# Altium PCB final_sensor_pcb_v3.PcbDoc (part 1 of 3)
Units mm, origin at the board's own origin, x right, y up, seen from the top; angles counter-clockwise.
Board outline 108.2 x 22.22 mm, 2 copper layers (Top Layer, Bottom Layer); 94 components, 57 nets, 253 pads, 98 vias.
Unrouted connection lines stored in the file: 1.
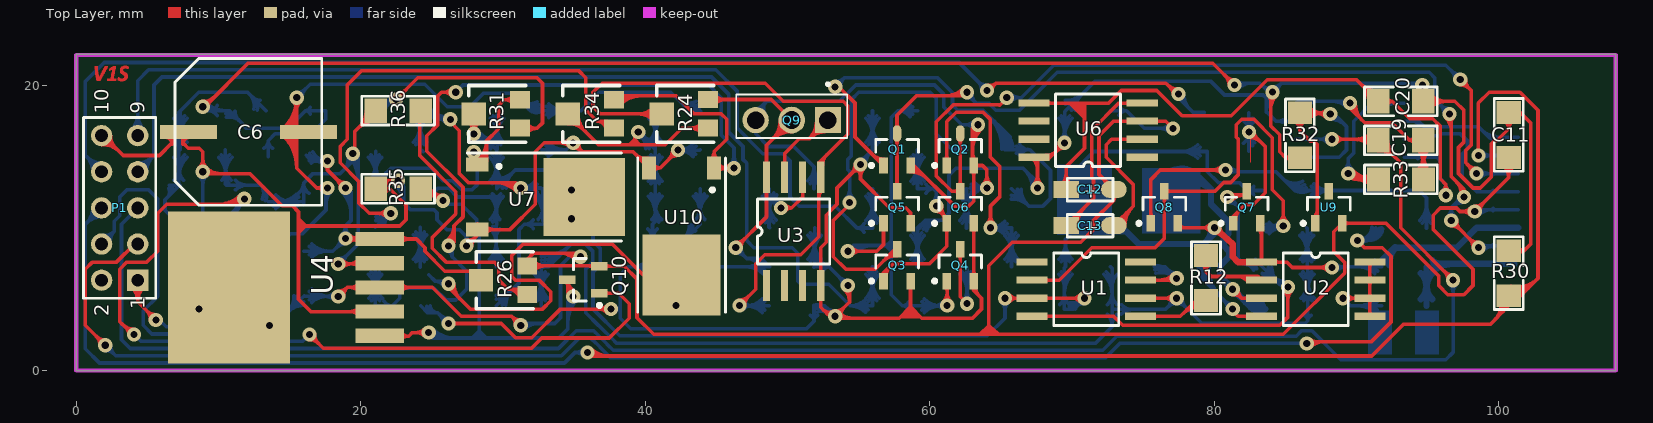
[diagram p0: Top Layer view]
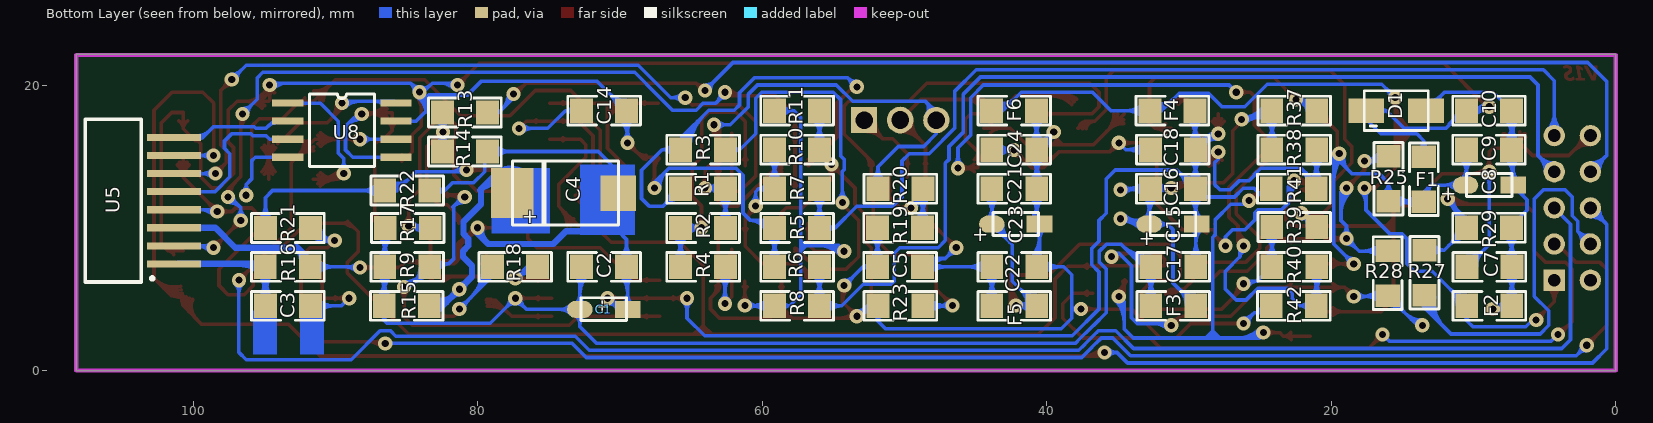
[diagram p1: Bottom Layer view, seen from below]

## Layer stack, top to bottom
Top Layer: signal copper 0.0356
Dielectric: dielectric 0.32, FR-4, Dk 4.8
Bottom Layer: signal copper 0.0356

## Board outline
0,22.225 108.204,22.225 108.204,0 0,0

## Design rules (kind name [scope] priority, off if disabled: settings)
Clearance [All] p1: gap=0.254
DiffPairsRouting [All] p1: maxlimit=0.254 minlimit=0.254 mostfreqgap=0.254 maxuncoupledlength=12.7
PolygonConnect [All] p1: connectstyle=Relief reliefconductorwidth=0.254 reliefentries=4 polygonreliefangle="90 Angle"
RoutingVias [All] p1: holewidth=0.5 width=1 viastyle="Through Hole" minholewidth=0.5 minwidth=1 maxholewidth=0.5 maxwidth=1
SilkscreenOverComponentPads [All] p1: minsilkscreentomaskgap=0.254
SolderMaskExpansion [All] p1: expansion=0.102
Width [All] p1: maxlimit=0.5 minlimit=0.15 preferedwidth=0.15
26 further rules are at their usual default settings.

## Classes and differential pairs
differential pair OUT: +OUT_P -OUT_N

## Components (designator, comment, footprint, x,y, rotation, side; value= is the part's Value field where it differs from the comment)
C1 "4.7uf" cap_smd_a 71.133,4.322 r180 bottom
C2 "100nF" 1206 71.095,7.264 r270 bottom
C3 "0.22UF" 1206 93.345,4.572 r90 bottom
C4 "470uf" cap_smd_d 73.787,12.446 r0 bottom
C5 "100nf" 1206 50.292,7.264 r270 bottom
C6 "1000uf" c_cyl_smd 12.065,16.637 r180 top
C7 "100nf" 1206 8.89,7.315 r90 bottom
C8 "4.7uf" cap_smd_a 8.88,13.052 r180 bottom
C9 "100nf" 1206 8.918,15.545 r90 bottom
C10 "100nf" 1206 8.918,18.288 r90 bottom
C11 "100nf" 1206 100.711,16.574 r0 top
C12 "10uf" cap_smd_a 71.258,12.7 r180 top
C13 "10uf" cap_smd_a 71.258,10.16 r180 top
C14 "100nf" 1206 71.095,18.237 r270 bottom
C15 "4.7uf" cap_smd_a 31.115,10.308 r180 bottom
C16 "100nf" 1206 31.142,12.802 r90 bottom
C17 "100nf" 1206 31.115,7.315 r90 bottom
C18 "100nf" 1206 31.142,15.545 r90 bottom
C19 "Ceramic 330n" 1206 93.116,16.154 r270 top
C20 "100nf" 1206 93.116,18.898 r270 top
C21 "100nf" 1206 42.291,12.802 r90 bottom
C22 "100nf" 1206 42.291,7.315 r90 bottom
C23 "4.7uf" cap_smd_a 42.175,10.308 r180 bottom
C24 "100nf" 1206 42.291,15.545 r90 bottom
D1 "SMBJ5" tvs 15.494,18.288 r90 bottom
F1 "Ferrite bead" 1206 13.462,13.462 r180 bottom
F2 "Ferrite bead" 1206 8.865,4.521 r270 bottom
F3 "Ferrite bead" 1206 31.115,4.572 r90 bottom
F4 "Ferrite bead" 1206 31.142,18.237 r270 bottom
F5 "Ferrite bead" 1206 42.291,4.572 r90 bottom
F6 "Ferrite bead" 1206 42.266,18.237 r270 bottom
P1 "Header 5X2" HDR2X5 4.318,6.35 r90 top
Q1 "bc807" sot-23#1 57.658,15.494 r0 top
Q2 "bc807" sot-23#1 62.103,15.494 r0 top
Q3 "bc817" sot-23#2 57.658,7.366 r0 top
Q4 "bc817" sot-23#2 62.103,7.366 r0 top
Q5 "bc817" sot-23#2 57.658,11.43 r0 top
Q6 "bc817" sot-23#2 62.103,11.43 r0 top
Q7 "bc817" sot-23#3 82.233,11.43 r0 top
Q8 "bc817" sot-23#2 76.454,11.43 r0 top
Q9 "BD135" sot-32 50.292,17.907 r180 top
Q10 "bc817" sot-23#2 35.687,6.35 r90 top
R1 "10k" 1206 64.135,12.751 r270 bottom
R2 "10k" 1206 64.135,9.991 r270 bottom
R3 "1k" 1206 64.135,15.494 r270 bottom
R4 "1k" 1206 64.135,7.264 r270 bottom
R5 "0" 1206 57.531,9.991 r270 bottom
R6 "0" 1206 57.531,7.264 r270 bottom
R7 "470" 1206 57.531,12.751 r270 bottom
R8 "470" 1206 57.531,4.521 r270 bottom
R9 "18K" 1206 84.962,7.315 r90 bottom
R10 "10k" 1206 57.531,15.494 r270 bottom
R11 "10k" 1206 57.531,18.237 r270 bottom
R12 "100" 1206 79.375,6.489 r180 top
R13 "1K" 1206 80.898,18.161 r90 bottom
R14 "10K" 1206 80.898,15.418 r90 bottom
R15 "22" 1206 84.963,4.521 r270 bottom
R16 "1.5" 1206 93.32,7.264 r270 bottom
R17 "18K" 1206 84.924,10.042 r90 bottom
R18 "100" 1206 77.343,7.264 r270 bottom
R19 "10k" 1206 50.292,10.008 r270 bottom
R20 "10k" 1206 50.292,12.802 r90 bottom
R21 "1K" 1206 93.345,10.042 r90 bottom
R22 "10K" 1206 84.962,12.674 r90 bottom
R23 "10k" 1206 50.292,4.572 r90 bottom
R24 "RPot" "pot smd" 42.799,18.034 r90 top
R25 "Resistor" 1206 16.002,13.462 r0 bottom
R26 "RPot" "pot smd" 30.099,6.35 r90 top
R27 "1K" 1206 13.462,6.858 r0 bottom
R28 "Resistor" 1206 16.002,6.858 r180 bottom
R29 "1K" 1206 8.918,10.058 r90 bottom
R30 "Resistor" 1206 100.711,6.858 r0 top
R31 "RPot" "pot smd" 29.591,18.034 r90 top
R32 "Resistor" 1206 85.979,16.51 r180 top
R33 "Res 3K2" 1206 93.091,13.462 r90 top
R34 "RPot" "pot smd" 36.195,18.034 r90 top
R35 "1K" 1206 22.606,12.802 r90 top
R36 "Resistor" 1206 22.606,18.288 r90 top
R37 "Resistor" 1206 22.606,18.288 r90 bottom
R38 "Resistor" 1206 22.606,15.545 r90 bottom
R39 "Resistor" 1206 22.606,10.105 r90 bottom
R40 "Resistor" 1206 22.606,7.315 r90 bottom
R41 "Resistor" 1206 22.606,12.751 r270 bottom
R42 "Resistor" 1206 22.606,4.521 r270 bottom
U1 "TC4428" sop8 70.993,5.842 r0 top
U2 "IRF7105" sop8 87.122,5.842 r0 top
U3 "LM358N" sop8 50.292,9.779 r90 top
U4 "TL1963AKTTR" tl1963 21.336,5.842 r90 top
U5 "HMC1001" HMC1001 103.251,11.938 r90 bottom
U6 "LMC7660IM" sop8 71.12,16.764 r180 top
U7 "LM1117T-ADJ" dpak 31.496,11.938 r0 top
U8 "AMP04" sop8 89.535,17.018 r180 bottom
U9 "LM4040" sot-23#2 88.011,11.43 r0 top
U10 "LM1117T-ADJ" dpak 42.291,10.922 r270 top

## Footprints (in the part's own frame and the unit in brackets; to place one, negate y for a bottom-side part, rotate by r counter-clockwise, add the part's x,y. Pads: shape width x height; smd on the part's side, far side on the other; paste and mask are expansions set on the pad)
1206 [mm]
  rect 1.7x1.6 smd: 1(-0.025,-1.6) 2(-0.025,1.563)
  silkscreen extent -1.04,-2.57 0.99,2.54, body extent -0.81,-1.68 0.79,1.68, height 1.1
c_cyl_smd [mm]
  rect 4x1 smd: 1(4.191,-0.127) 2(-4.267,-0.127)
  silkscreen extent -5.18,-5.28 5.12,5.02, body extent -5.18,-5.28 5.12,5.02, height 10
cap_smd_a [mm]
  oval 1.8x1.2 smd: 1(-1.676,-0.025)
  rect 1.8x1.2 smd: 2(1.676,-0.025)
  silkscreen extent -1.6,-0.81 1.6,0.79
cap_smd_d [mm]
  rect 3x3.5 smd: 1(3.767,-0.025)
  rect 2.5x2.5 smd: 2(-3.683,-0.025)
  silkscreen extent -3.68,-2.29 3.77,2.21
dpak [mm]
  rect 1.6x1 smd: 1(-3.319,2.539) 3(-3.319,-2.031)
  rect 5.7x5.5 smd: 2(4.208,0.254)
  silkscreen extent -4.02,-2.83 6.83,3.34
HDR2X5 [mm] "Connector; Header; 5x2 Position"
  rect 1.5x1.5 hole 0.9: 1(0,0)
  round 1.5 hole 0.9: 2(0,2.54) 3(2.54,0) 4(2.54,2.54) 5(5.08,0) 6(5.08,2.54) 7(7.62,0) 8(7.62,2.54) 9(10.16,0) 10(10.16,2.54)
  silkscreen extent -1.27,-1.27 11.43,3.81
HMC1001 [mm]
  rect 0.5x3.81 smd: 1(-4.445,-1.905) 2(-3.175,-1.905) 3(-1.905,-1.905) 4(-0.635,-1.905) 5(0.635,-1.905) 6(1.905,-1.905) 7(3.175,-1.905) 8(4.445,-1.905)
  silkscreen extent -5.71,-0.48 5.71,4.32
"pot smd" [mm]
  rect 1.2x1.4 smd: 1(-1,-1.6) 3(1,-1.6)
  rect 1.6x1.7 smd: 2(0,1.65)
  silkscreen extent -2,-2 2,2
sop8 [mm]
  rect 2.2x0.5 smd: 1(-3.81,1.778) 2(-3.81,0.508) 3(-3.81,-0.762) 4(-3.81,-2.032) 5(3.806,-2.032) 6(3.806,-0.762) 7(3.806,0.508) 8(3.806,1.778)
  silkscreen extent -2.29,-2.67 2.29,2.41
sot-23#1 [mm]
  rect 0.6x1.15 smd: 1(-0.919,-1.081) 2(0.981,-1.081)
  oval 0.6x1.15 smd: 3(0.031,1.169)
  silkscreen extent -1.89,-1.21 1.53,0.74, body extent -1.42,-1.18 1.48,1.12, height 1
sot-23#2 [mm]
  rect 0.6x1.15 smd: 1(-0.919,-1.081) 2(0.981,-1.081) 3(0.031,1.169)
  silkscreen extent -1.89,-1.21 1.53,0.74, body extent -1.42,-1.18 1.48,1.12, height 1
sot-23#3 [mm]
  rect 0.6x1 smd: 1(-0.919,-1.081)
  rect 0.6x1.15 smd: 2(0.981,-1.081) 3(0.031,1.169)
  silkscreen extent -1.89,-1.21 1.53,0.74, body extent -1.42,-1.18 1.48,1.12, height 1
sot-32 [mm]
  rect 1.85x1.85 hole 1.23: 1(-2.54,0.305)
  round 1.88 hole 1.25: 2(0,0.305)
  round 1.85 hole 1.23: 3(2.54,0.305)
  silkscreen extent -3.9,-2.32 3.9,1.56
tl1963 [mm]
  rect 1x3.4 smd: 1(-3.4,0) 2(-1.7,0) 3(0,0) 4(1.7,0) 5(3.4,0)
  rect 10.7x8.6 smd: 3(0,10.6)
tvs [mm]
  rect 1.7x2.5 smd: 1(-0.025,-2.159) 2(-0.025,2.032)
  silkscreen extent -1.42,-2.32 1.38,2.18, body extent -1.5,-2.76 1.42,2.74, height 2.23

## Part data
C1 C4 C8 C12 C13 C15 C23: library part "Cap Pol1", "Polarized Capacitor (Radial)"
C2 C3 C5 C7 C9 C10 C11 C14 C16 C17 C18 C19 C20 C21 C22 C24: library part Cap, "Capacitor"
C6: library part "Cap Pol1", "electrolytic smd cap"
D1: library part "Diode 10TQ040", "tvs"
F1 F2 F3 F4 F5 F6: library part Inductor, "Ferrite bead, 1206"
P1: "Header, 5-Pin, Dual row"
Q1 Q2: library part 2N3906, "PNP General Purpose Amplifier"
Q3 Q4 Q5 Q6 Q7 Q8 Q9 Q10: library part 2N3904, "NPN General Purpose Amplifier"
R1 R2 R3 R4 R5 R6 R7 R8 R9 R10 R11 R12 R13 R14 R15 R16 R17 R18 R19 R20 R21 R22 R23 R27 R29 R35: library part Res1, "Resistor"
R24 R26 R31 R34: "Potentiometer"
R25 R28 R30 R32 R36 R37 R38 R39 R40 R41 R42: "Resistor, 1/4W"
R33: library part Resistor, "General Resistor"
U2: library part IRF7106
U3: "Dual Low-Power Operational Amplifier"
U4: library part TL1963
U6: "Switched Capacitor Voltage Converter"
U7 U10: "800mA Low-Dropout Linear Regulator"
U8: library part "Op Amp"
U9: "Precision Micropower Shunt Voltage Reference, 3-pin SOT-23"

## Via types
v1: diameter 1, hole 0.5, Top Layer to Bottom Layer, 98 vias

## Nets (pads, with @x,y where several pads share a name; then routed paths per layer and width w, separated by ;. In a path a pad name is that pad's centre, name@x,y a point inside that pad or via, vN(x,y) a via of type N, cw(c..) or ccw(c..) an arc to the next point about the centre after c; other vN are vias at no path point)
5V0: C10.2 C11.2 C14.2 C20.2 D1.2 F1.2 R5.1 R6.1 R30.2 R32.2 U6.8 U8.7 | length 245.3
  Top Layer w0.254: v1@8.89,18.661 ccw(c8.89,19.255) 9.31,18.835 ; v1@8.89,18.915 ccw(c8.89,20.122) 9.744,19.269 ; v1@9.144,18.669 12.065,21.59 79.883,21.59 v1(81.407,20.066) ; v1@9.263,18.542 cw(c9.857,18.542) 9.437,18.962 ; U6.8@67.227,14.899 cw(c66.414,14.086) 67.564,14.086 ; v1@67.3,13.091 ccw(c66.664,13.727) 67.564,13.727 ccw(c68.464,13.727) v1@67.828,13.091 ; U6.8@67.407,15.079 cw(c67.027,14.699) 67.564,14.699 ; v1(67.564,12.827) 67.564,14.736 U6.8@67.314,14.986 68.453,14.986 ; U6.8@68.164,14.855 ccw(c68.164,15.236) 68.434,14.967 ; U6.8@68.164,15.109 ccw(c68.164,16.104) 68.867,15.4 ; U6.8@68.253,14.901 cw(c68.453,14.708) 68.453,14.986 ; U6.8@68.253,15.071 ccw(c68.453,15.264) 68.453,14.986 ; v1@69.096,16.002 cw(c68.196,16.002) 68.832,15.365 cw(c69.469,14.729) v1@69.469,15.629 ; v1(69.469,16.002) 68.453,14.986 ; v1@81.034,20.066 ccw(c80.134,20.066) 80.77,20.703 ccw(c81.407,21.339) v1@81.407,20.439 ; v1@83.819,19.302 cw(c83.51,18.993) 83.947,18.993 ; 83.947,18.338 cw(c85.311,18.338) v1@84.346,19.302 ; 83.947,18.951 cw(c84.698,18.951) v1@84.167,19.482 ; v1@83.947,19.431 83.947,17.204 84.582,16.569 84.582,15.367 85.002,14.947 ; R32.2@85.32,14.722 ccw(c85.002,14.61) 85.002,14.947 ; R32.2@85.32,15.172 cw(c85.002,15.285) 85.002,14.947 ; R32.2@86.004,14.947 85.002,14.947 ; C20.2@94.275,19.511 ccw(c93.762,20.193) v1@94.615,20.193 ; v1@94.351,19.802 cw(c93.715,19.166) 94.615,19.166 cw(c95.515,19.166) v1@94.879,19.802 ; C20.2@94.615,18.987 v1@94.615,20.193 ; C20.2@94.615,19.773 ccw(c95.099,19.773) C20.2@94.874,19.344 ; C20.2@94.679,18.923 96.901,18.923 97.536,18.288 97.536,16.061 97.155,15.68 97.155,13.843 98.171,12.827 98.679,12.827 99.455,13.603 99.455,15.932 99.678,16.155 99.848,16.155 100.686,16.993 ; C20.2@94.975,18.627 cw(c95.691,17.912) 95.691,18.923 cw(c95.691,19.935) C20.2@94.975,19.219 ; C20.2@94.992,19.569 cw(c95.32,20.193) v1@94.615,20.193 ; C20.2@95.155,18.447 cw(c96.304,17.298) 96.304,18.923 cw(c96.304,20.548) C20.2@95.155,19.399 ; C11.2@100.358,17.549 cw(c100.049,16.993) 100.686,16.993 ; R30.2@100.686,8.421 101.766,8.421 ; C11.2@101.013,17.549 ccw(c101.322,16.993) 100.686,16.993 ; R30.2@101.352,8.15 cw(c101.766,7.969) 101.766,8.421 ; R30.2@101.352,8.691 ccw(c101.766,8.873) 101.766,8.421 ; 100.686,16.993 C11.2@100.686,18.137 101.497,18.137 102.235,17.399 102.235,8.89 101.766,8.421
  Bottom Layer w0.254: v1@8.89,18.415 v1(8.89,18.542) ; v1@8.974,18.626 ccw(c9.852,19.504) C10.2@9.852,18.263 ; v1@9.154,18.806 ccw(c10.465,20.117) C10.2@10.465,18.263 ; C10.2@9.915,17.898 ccw(c9.246,17.467) v1@9.246,18.263 ; C10.2@9.915,18.627 cw(c9.246,19.059) v1@9.246,18.263 ; C10.2@10.511,18.051 cw(c10.654,17.298) C10.2@11.196,17.839 ; C10.2@10.558,17.801 cw(c10.762,16.727) 11.535,17.5 ; C10.2@11.153,18.213 ccw(c11.952,18.213) 11.387,17.648 ; F1.2@13.167,15.617 ccw(c12.876,16.154) 13.487,16.154 ; F1.2@13.487,15.025 13.487,16.154 ; F1.2@13.808,15.617 cw(c14.099,16.154) 13.487,16.154 ; D1.2@16.444,18.022 ccw(c16.104,17.901) 16.104,18.263 ; D1.2@16.444,18.504 cw(c16.104,18.624) 16.104,18.263 ; R6.1@58.655,7.816 ccw(c57.506,8.965) 59.131,8.965 ccw(c60.756,8.965) R6.1@59.607,7.816 ; R5.1@58.655,9.491 cw(c57.506,8.342) 59.131,8.342 cw(c60.756,8.342) R5.1@59.607,9.491 ; R6.1@58.835,7.636 ccw(c58.12,8.351) 59.131,8.351 ccw(c60.143,8.351) R6.1@59.427,7.636 ; R5.1@58.835,9.67 cw(c58.12,8.955) 59.131,8.955 cw(c60.143,8.955) R5.1@59.427,9.67 ; R6.1@59.131,7.29 R5.1@59.131,10.017 59.664,10.549 60.817,10.549 ; R5.1@59.285,10.007 cw(c60.076,9.701) 60.076,10.549 ; R5.1@59.522,9.915 cw(c60.446,9.558) 60.446,10.549 ; R5.1@59.759,9.824 cw(c60.817,9.415) 60.817,10.549 ; 66.658,14.114 cw(c65.371,12.827) v1@67.191,12.827 ; 67.091,13.681 cw(c66.238,12.827) v1@67.445,12.827 ; v1(67.564,12.827) 67.564,13.208 66.548,14.224 61.831,14.224 61.341,13.734 61.341,11.073 60.817,10.549 ; C14.2@69.056,17.737 cw(c68.059,16.74) 69.469,16.74 ; v1@69.205,16.266 ccw(c68.569,16.902) 69.469,16.902 ccw(c70.369,16.902) v1@69.733,16.266 ; C14.2@69.236,17.916 cw(c68.672,17.353) 69.469,17.353 ; v1@69.469,16.436 cw(c71.308,16.436) C14.2@70.008,17.737 ; 69.469,17.049 cw(c70.695,17.049) C14.2@69.828,17.916 ; C14.2@69.532,18.732 ccw(c69.532,19.864) 70.332,19.063 ; C14.2@69.532,18.986 ccw(c69.532,20.731) 70.766,19.497 ; v1@69.596,16.002 v1(69.469,16.002) 69.469,18.2 C14.2@69.532,18.263 71.589,20.32 79.756,20.32 80.709,19.367 83.418,19.367 83.641,19.143 ; C14.2@69.951,18.313 cw(c70.842,18.313) C14.2@70.212,18.942 ; C14.2@70.205,18.313 cw(c71.709,18.313) 70.645,19.376 ; v1(81.407,20.066) 81.534,20.193 83.185,20.193 83.812,19.566 v1@84.064,19.566 ; v1@81.491,19.982 cw(c82.001,19.472) 82.001,20.193 cw(c82.001,20.66) v1@81.671,20.33 ; v1@81.671,19.802 cw(c82.614,18.859) 82.614,20.193 ; 83.32,20.058 ccw(c83.749,20.486) v1@83.955,19.917 ; 83.603,19.775 ccw(c83.899,20.072) v1@84.042,19.678 ; 83.641,18.143 cw(c84.92,18.143) v1@84.272,19.244 ; 83.641,18.587 cw(c84.659,18.587) v1@84.143,19.463 ; 83.641,19.031 cw(c84.398,19.031) v1@84.014,19.682 ; v1@84.087,19.939 ccw(c84.096,20.806) 84.71,20.193 ; v1@84.456,19.57 cw(c85.323,19.58) 84.71,20.193 ; U8.7@84.792,17.439 ccw(c84.582,17.229) 84.582,17.526 ccw(c84.582,17.823) U8.7@84.792,17.613 ; U8.7@85.729,17.526 84.328,17.526 83.641,18.213 83.641,19.143 ; 93.408,20.193 cw(c93.408,18.859) v1@94.351,19.802 ; v1@94.351,20.33 cw(c94.021,20.66) 94.021,20.193 cw(c94.021,19.472) v1@94.531,19.982 ; v1@94.615,20.193 84.71,20.193 ; v1@9.246,18.263 C10.2@10.48,18.263 10.773,18.263 11.704,17.331 11.704,17.255 11.927,17.032 14.873,17.032 16.104,18.263 ; 13.487,16.154 13.97,16.637 16.51,16.637 17.526,17.653 D1.2@17.526,18.263 16.104,18.263 ; 83.641,19.143 v1@84.064,19.566 ; v1@84.064,19.566 v1(84.083,19.566) 84.71,20.193
  other v1: 94.615,20.066
8V0: C1.1 C2.1 C17.2 F3.2 R9.2 R15.1 R17.2 U1.6 | length 124.4
  Top Layer w0.254: U1.6@74.799,5.08 v1(77.343,5.08) ; U1.6@75.736,4.993 cw(c75.946,4.783) 75.946,5.08 cw(c75.946,5.377) U1.6@75.736,5.167 ; v1@77.079,4.816 ccw(c76.442,4.179) 76.442,5.08 ccw(c76.443,5.98) v1@77.079,5.344
  Bottom Layer w0.254: F3.2@32.202,5.073 ccw(c31.053,6.221) 32.678,6.221 ccw(c34.303,6.221) F3.2@33.154,5.073 ; C17.2@32.202,6.764 cw(c31.053,5.615) 32.678,5.615 cw(c34.303,5.615) C17.2@33.154,6.764 ; F3.2@32.382,4.893 ccw(c31.666,5.608) 32.678,5.608 ccw(c33.689,5.608) F3.2@32.974,4.893 ; C17.2@32.382,6.944 cw(c31.666,6.228) 32.678,6.228 cw(c33.689,6.228) C17.2@32.974,6.944 ; C17.2@32.677,7.251 ccw(c32.682,8.402) 33.496,7.588 ; F3.2@32.678,4.547 C17.2@32.678,7.29 33.198,7.29 34.79,8.882 ; C17.2@32.678,7.505 ccw(c32.685,9.262) 33.927,8.019 ; C17.2@32.679,7.759 ccw(c32.688,10.121) 34.359,8.451 ; C17.2@32.68,8.013 ccw(c32.692,10.98) 34.79,8.882 ; C2.1@72.219,6.764 cw(c70.794,5.339) 72.809,5.339 ; C2.1@72.399,6.943 cw(c71.408,5.952) 72.809,5.952 ; C1.1@72.475,3.962 cw(c71.667,3.155) 72.809,3.155 cw(c73.951,3.155) C1.1@73.143,3.962 ; C1.1@72.475,4.631 ccw(c71.667,5.439) 72.809,5.439 ccw(c73.951,5.439) C1.1@73.143,4.631 ; C2.1@72.695,7.29 72.809,7.175 C1.1@72.809,4.297 ; 72.809,5.891 cw(c74.044,5.891) C2.1@73.171,6.764 ; C1.1@73.443,3.962 cw(c74.251,3.155) 74.251,4.297 cw(c74.251,5.439) C1.1@73.443,4.631 ; v1@76.97,5.08 cw(c76.07,5.08) 76.706,4.443 cw(c77.343,3.807) 77.343,4.707 cw(c77.343,3.807) 77.98,4.443 cw(c78.616,5.08) v1@77.716,5.08 ; R17.2@86.011,9.491 cw(c84.772,8.252) 86.524,8.252 ; R9.2@86.049,6.764 cw(c84.806,5.521) 86.563,5.521 ; R9.2@86.049,7.815 ccw(c84.9,8.964) 86.524,8.964 ccw(c88.149,8.964) R9.2@87,7.815 ; R15.1@86.087,5.072 ccw(c84.938,6.221) 86.563,6.221 ccw(c88.188,6.221) R15.1@87.039,5.072 ; R17.2@86.191,9.67 cw(c85.385,8.865) 86.524,8.865 ; R9.2@86.228,6.943 cw(c85.419,6.134) 86.563,6.134 ; R9.2@86.228,7.636 ccw(c85.513,8.351) 86.524,8.351 ccw(c87.536,8.351) R9.2@86.821,7.636 ; R15.1@86.267,4.893 ccw(c85.552,5.608) 86.563,5.608 ccw(c87.575,5.608) R15.1@86.859,4.893 ; R15.1@86.315,3.871 cw(c86.17,3.505) 86.563,3.505 ; R17.2@86.487,10.017 86.524,9.979 R9.2@86.524,7.29 86.563,7.251 R15.1@86.563,4.547 86.563,3.505 ; 86.524,8.432 cw(c88.021,8.432) R17.2@86.963,9.491 ; 86.524,9.045 cw(c87.408,9.045) R17.2@86.783,9.67 ; 86.563,5.708 cw(c88.056,5.708) R9.2@87,6.764 ; 86.563,6.322 cw(c87.442,6.322) R9.2@86.821,6.943 ; R15.1@86.812,3.871 ccw(c86.957,3.505) 86.563,3.505 ; 34.79,8.882 35.798,8.882 36.314,8.366 36.314,7.636 35.814,7.136 35.814,4.064 36.711,3.167 36.727,3.167 37.838,2.056 37.838,2.04 37.95,1.928 71.651,1.928 72.809,3.086 C1.1@72.809,4.297 ; C1.1@72.809,4.297 76.56,4.297 v1(77.343,5.08) 79.107,3.316 86.374,3.316 86.563,3.505
12V0: C5.2 C22.2 F5.2 Q9.2 R24.3 U3.8 | length 58.5
  Top Layer w0.254: R24.3@44.399,19.034 44.415,19.05 48.844,19.05 Q9.2@50.292,17.602 48.514,15.824 U3.8@48.514,13.585 48.514,10.795 v1(46.355,8.636) ; R24.3@44.833,18.7 cw(c45.68,17.854) 45.68,19.05 ; R24.3@44.833,19.368 ccw(c45.602,20.137) 45.602,19.05 ; v1@46.355,9.009 ccw(c46.355,9.909) 46.992,9.273 ccw(c47.628,8.636) v1@46.728,8.636 ; U3.8@48.427,12.648 cw(c48.217,12.438) 48.514,12.438 cw(c48.811,12.438) U3.8@48.601,12.648 ; U3.8@48.427,14.522 ccw(c48.217,14.732) 48.514,14.732 ccw(c48.811,14.732) U3.8@48.601,14.522 ; Q9.2@49.479,17.602 cw(c47.516,17.602) 48.904,16.214 cw(c50.292,14.826) Q9.2@50.292,16.789 ; Q9.2@49.733,17.602 cw(c48.383,17.602) 49.338,16.648 cw(c50.292,15.693) Q9.2@50.292,17.043
  Bottom Layer w0.254: F5.2@43.378,5.073 ccw(c42.229,6.221) 43.854,6.221 ccw(c45.479,6.221) F5.2@44.33,5.073 ; C22.2@43.378,6.764 cw(c42.229,5.615) 43.854,5.615 cw(c45.479,5.615) C22.2@44.33,6.764 ; F5.2@43.558,4.893 ccw(c42.842,5.608) 43.854,5.608 ccw(c44.865,5.608) F5.2@44.15,4.893 ; C22.2@43.558,6.944 cw(c42.842,6.228) 43.854,6.228 cw(c44.865,6.228) C22.2@44.15,6.944 ; F5.2@43.854,4.547 C22.2@43.854,7.29 C5.2@48.729,7.29 48.145,7.874 47.117,7.874 ; C22.2@44.15,6.994 cw(c44.865,6.278) 44.865,7.29 cw(c44.865,8.301) C22.2@44.15,7.586 ; C22.2@44.33,6.814 cw(c45.479,5.665) 45.479,7.29 cw(c45.479,8.915) C22.2@44.33,7.766 ; v1@46.355,8.263 cw(c46.355,7.363) 46.992,7.999 cw(c47.628,8.636) v1@46.728,8.636 ; v1(46.355,8.636) 47.117,7.874 ; 47.456,7.874 cw(c47.456,6.966) C5.2@48.327,7.222 ; 47.795,7.874 cw(c47.795,7.066) C5.2@48.571,7.293 ; C5.2@48.083,7.15 ccw(c47.117,6.867) 47.117,7.874 ; C5.2@48.253,6.814 ccw(c47.104,5.665) 47.104,7.29 ccw(c47.104,8.915) C5.2@48.253,7.766 ; C5.2@48.433,6.994 ccw(c47.718,6.278) 47.718,7.29 ccw(c47.718,8.301) C5.2@48.433,7.586
-5V0: C12.2 C20.1 U6.5 U8.4 | length 59.3
  Top Layer w0.254: U6.5@67.314,18.796 69.85,18.796 ; U6.5@68.251,18.709 cw(c68.461,18.499) 68.461,18.796 cw(c68.461,19.093) U6.5@68.251,18.883 ; C12.2@69.247,13.06 ccw(c68.44,13.867) 69.582,13.867 ccw(c70.724,13.867) C12.2@69.916,13.06 ; C12.2@69.582,12.725 69.582,14.337 70.866,15.621 70.866,17.78 69.85,18.796 ; 83.21,19.939 83.261,19.99 ; 90.282,20.157 ccw(c91.516,21.392) C20.1@91.516,19.646 ; 90.403,20.037 cw(c89.339,18.973) C20.1@90.843,18.973 ; 90.716,19.724 ccw(c91.516,20.524) C20.1@91.516,19.392 ; C20.1@90.836,19.603 cw(c90.206,18.973) C20.1@91.097,18.973 ; C20.1@92.146,18.685 cw(c92.49,18.555) 92.49,18.923 ; C20.1@92.146,19.161 ccw(c92.49,19.292) 92.49,18.923 ; 95.86,14.469 95.86,17.188 95.356,17.692 93.721,17.692 92.49,18.923 ; 95.872,14.456 95.872,13.475 96.266,13.081 ; v1@96.037,12.614 ccw(c95.674,13.081) 96.266,13.081 ; v1(96.266,12.319) 96.266,13.081 ; v1@96.495,12.614 cw(c96.858,13.081) 96.266,13.081 ; 69.85,18.796 72.561,18.796 73.45,19.685 75.946,19.685 77.724,17.907 81.178,17.907 83.261,19.99 ; 83.261,19.99 83.718,20.447 84.448,20.447 89.992,20.447 C20.1@91.516,18.923 92.49,18.923
  Bottom Layer w0.254: U8.4@93.345,14.986 95.631,14.986 95.885,14.732 95.885,13.462 96.266,13.081 ; U8.4@94.282,14.899 cw(c94.492,14.689) 94.492,14.986 cw(c94.492,15.283) U8.4@94.282,15.073 ; v1@96.037,12.614 ccw(c95.674,13.081) 96.266,13.081 ; v1(96.266,12.319) 96.266,13.081 ; v1@96.495,12.614 cw(c96.858,13.081) 96.266,13.081
ADS_IN: C19.1 P1.5 U8.6 | length 143.4
  Top Layer w0.254: v1(88.265,16.256) 91.44,16.256 C19.1@91.516,16.18 93.091,14.605 93.091,10.033 v1(96.774,6.35) ; v1@88.529,15.992 cw(c89.165,15.356) 89.165,16.256 cw(c89.165,17.156) v1@88.529,16.52 ; 89.828,16.256 cw(c89.828,14.542) C19.1@91.04,15.754 ; 89.955,16.256 ccw(c89.955,17.791) C19.1@91.04,16.706 ; 90.441,16.256 cw(c90.441,15.155) C19.1@91.22,15.934 ; 90.568,16.256 ccw(c90.568,17.178) C19.1@91.22,16.526 ; C19.1@91.516,15.457 cw(c91.516,13.711) 92.75,14.946 ; C19.1@91.516,15.711 cw(c91.516,14.579) 92.317,15.379 ; C19.1@91.935,16.13 ccw(c92.826,16.13) C19.1@92.196,15.5 ; C19.1@92.189,16.13 ccw(c93.693,16.13) 92.63,15.066 ; v1@96.401,6.35 ccw(c95.501,6.35) 96.137,6.987 ccw(c96.774,7.623) v1@96.774,6.723
  Bottom Layer w0.254: P1.5@4.318,11.43 3.175,10.287 3.175,2.159 3.787,1.547 33.888,1.547 35.135,2.794 36.366,2.794 36.501,2.659 36.516,2.659 37.33,1.845 37.33,1.83 37.74,1.42 72.145,1.42 73.138,2.413 85.749,2.413 86.122,2.786 86.852,2.786 88.876,0.762 96.266,0.762 96.774,1.27 v1(96.774,6.35) ; U8.6@85.729,16.256 v1@88.011,16.256 ; U8.6@86.666,16.169 cw(c86.876,15.959) 86.876,16.256 cw(c86.876,16.553) U8.6@86.666,16.343 ; v1@88.001,15.992 ccw(c87.365,15.356) 87.365,16.256 ccw(c87.365,17.156) v1@88.001,16.52 ; v1@96.51,6.086 cw(c95.874,5.45) 96.774,5.45 cw(c97.674,5.45) v1@97.038,6.086
BGND: C5.1 C21.1 C22.1 C23.2 C24.1 F6.2 Q3.2 Q4.2 Q5.2 Q6.2 R10.2 R11.2 R19.1 R23.2 R24.1 R34.2 R42.1 U3.4 | length 207.3
  Top Layer w0.254: v1(26.162,3.302) 29.869,3.302 30.877,2.294 32.012,2.294 34.036,4.318 v1(37.592,4.318) ; R34.2@34.545,18.034 36.704,15.875 39.243,15.875 ; R34.2@34.595,17.361 cw(c34.595,15.857) 35.659,16.92 ; R34.2@34.595,17.615 cw(c34.595,16.724) R34.2@35.225,17.354 ; R34.2@35.014,18.034 ccw(c36.146,18.034) 35.346,17.233 ; R34.2@35.268,18.034 ccw(c37.013,18.034) 35.779,16.8 ; v1@37.328,4.054 ccw(c36.692,3.418) 36.692,4.318 ccw(c36.692,5.218) v1@37.328,4.582 ; v1(39.497,16.764) 39.37,16.764 39.243,16.637 39.243,15.875 ; R24.1@43.965,16.7 ccw(c43.157,15.892) 43.157,17.034 ccw(c43.157,18.176) R24.1@43.965,17.368 ; R24.1@44.399,17.034 42.561,17.034 41.402,15.875 39.243,15.875 ; U3.4@52.237,5.032 cw(c52.027,4.822) 52.324,4.822 cw(c52.621,4.822) U3.4@52.411,5.032 ; U3.4@52.237,6.906 ccw(c52.027,7.116) 52.324,7.116 ccw(c52.621,7.116) U3.4@52.411,6.906 ; 52.515,4.254 ccw(c52.922,4.662) v1@53.176,4.145 ; 52.766,4.003 ccw(c53.087,4.325) v1@53.288,3.917 ; v1@53.023,3.746 52.324,4.445 U3.4@52.324,5.969 52.324,8.636 52.705,9.017 52.705,10.922 53.467,11.684 53.467,12.827 v1(55.118,14.478) 55.118,13.462 57.15,11.43 58.293,11.43 58.639,11.084 Q5.2@58.639,10.349 ; v1@53.086,3.81 v1(53.34,3.81) 54.356,4.826 v1@54.356,5.969 ; v1@53.34,3.683 57.842,3.683 58.639,4.48 ; v1@53.34,4.183 ccw(c53.34,5.083) 53.977,4.447 ccw(c54.613,3.81) v1@53.713,3.81 ; v1@53.424,3.894 ccw(c53.934,4.404) 53.934,3.683 ccw(c53.934,3.216) v1@53.604,3.546 ; v1@53.604,4.074 ccw(c54.547,5.017) 54.547,3.683 ; v1@53.975,5.696 cw(c53.157,4.819) 54.356,4.819 ; v1@54.148,5.882 cw(c53.701,5.403) 54.356,5.403 ; 54.356,5.375 cw(c54.823,5.375) v1@54.493,5.705 ; v1@54.745,14.478 cw(c53.845,14.478) 54.481,13.841 cw(c55.118,13.205) v1@55.118,14.105 ; v1@54.854,14.214 cw(c54.218,13.578) 55.118,13.578 cw(c56.018,13.578) v1@55.382,14.214 ; Q3.2@58.517,5.888 cw(c58.221,5.592) 58.639,5.592 cw(c59.057,5.592) Q3.2@58.761,5.888 ; Q5.2@58.517,10.746 ccw(c58.221,11.042) 58.639,11.042 ccw(c59.057,11.042) Q5.2@58.761,10.746 ; Q3.2@58.639,6.285 58.639,4.48 ; Q4.2@62.962,6.682 ccw(c62.666,6.978) 63.084,6.978 ccw(c63.502,6.978) Q4.2@63.206,6.682 ; Q6.2@62.962,9.952 cw(c62.666,9.656) 63.084,9.656 cw(c63.502,9.656) Q6.2@63.206,9.952 ; Q4.2@63.006,6.031 ccw(c63.451,5.909) 63.125,5.582 ; Q6.2@63.084,10.349 Q4.2@63.084,6.285 63.084,5.623 ; Q4.2@63.251,5.964 ccw(c63.936,5.776) 63.433,5.274 ; 58.639,4.48 59.436,3.683 62.992,3.683 63.627,4.318 63.627,5.08 63.084,5.623 ; 63.084,5.623 cw(c63.43,5.623) 63.199,5.881 ccw(c63.43,5.623) 63.084,5.623 ; 63.084,5.623 ccw(c62.738,5.623) 62.969,5.881 cw(c62.738,5.623) 63.084,5.623
  Bottom Layer w0.254: R42.1@24.206,4.547 24.689,4.064 25.4,4.064 ; R42.1@24.624,4.529 ccw(c25.126,4.567) 25.126,4.064 ; R42.1@24.877,4.548 ccw(c25.4,4.588) 25.4,4.064 ; v1@25.789,3.302 ccw(c24.889,3.302) 25.525,3.939 ccw(c26.162,4.575) v1@26.162,3.675 ; v1(26.162,3.302) 25.4,4.064 ; v1(37.592,4.318) 38.227,4.318 ; v1@37.918,4.136 cw(c38.227,3.964) 38.227,4.318 ; v1@37.918,4.5 ccw(c38.227,4.672) 38.227,4.318 ; v1@39.497,16.391 cw(c39.497,15.613) C24.1@40.047,16.163 ; v1(39.497,16.764) 39.37,16.764 39.243,16.637 39.573,16.637 C24.1@40.691,15.519 ; v1@39.87,16.764 ccw(c40.893,16.764) C24.1@40.17,16.041 ; C24.1@39.981,16.229 ccw(c40.575,16.823) C24.1@40.652,15.987 ; C24.1@40.018,15.579 ccw(c38.585,15.599) 39.598,16.612 ccw(c40.51,17.524) C24.1@40.629,16.24 ; C24.1@40.024,16.187 cw(c39.424,15.587) C24.1@40.272,15.575 ; C23.2@40.164,9.949 cw(c39.357,9.141) 40.499,9.141 cw(c41.641,9.141) C23.2@40.833,9.949 ; C22.1@40.215,6.814 ccw(c39.066,5.665) 39.066,7.29 ccw(c39.066,8.915) C22.1@40.215,7.766 ; C22.1@40.215,7.816 ccw(c39.53,8.501) 40.499,8.501 ; C21.1@40.215,12.25 cw(c39.066,11.102) 40.691,11.102 cw(c42.316,11.102) C21.1@41.167,12.25 ; C21.1@40.215,13.302 ccw(c39.066,14.451) 40.691,14.451 ccw(c42.316,14.451) C21.1@41.167,13.302 ; C24.1@40.215,14.994 cw(c39.066,13.845) 40.691,13.845 cw(c42.316,13.845) C24.1@41.167,14.994 ; C24.1@40.215,16.045 ccw(c39.037,17.223) 40.703,17.223 ; F6.2@40.227,17.737 cw(c39.078,16.588) 40.703,16.588 cw(c42.328,16.588) F6.2@41.179,17.737 ; C22.1@40.395,6.994 ccw(c39.679,6.278) 39.679,7.29 ccw(c39.679,8.301) C22.1@40.395,7.586 ; C21.1@40.395,12.43 cw(c39.679,11.715) 40.691,11.715 cw(c41.702,11.715) C21.1@40.987,12.43 ; C21.1@40.395,13.123 ccw(c39.679,13.838) 40.691,13.838 ccw(c41.702,13.838) C21.1@40.987,13.123 ; C24.1@40.395,15.173 cw(c39.679,14.458) 40.691,14.458 cw(c41.702,14.458) C24.1@40.987,15.173 ; C24.1@40.395,15.866 ccw(c39.65,16.61) 40.703,16.61 ; F6.2@40.407,17.916 cw(c39.691,17.201) 40.703,17.201 cw(c41.714,17.201) F6.2@40.999,17.916 ; C23.2@40.464,10.617 ccw(c39.917,11.165) 40.691,11.165 ; 40.499,8.202 ccw(c41.553,8.202) C22.1@40.807,7.457 ; 40.499,8.815 ccw(c42.166,8.815) C22.1@40.987,7.636 ; 40.499,9.429 ccw(c42.78,9.429) C22.1@41.167,7.816 ; 40.691,11.072 ccw(c41.588,11.072) C23.2@40.953,10.438 ; 40.691,11.685 ccw(c42.201,11.685) C23.2@41.133,10.617 ; 40.703,16.552 ccw(c41.673,16.552) C24.1@40.987,15.866 ; 40.703,17.165 ccw(c42.287,17.165) C24.1@41.167,16.045 ; F6.2@40.703,18.263 40.703,15.531 C24.1@40.691,15.519 ; C5.1@51.416,7.816 ccw(c50.267,8.965) 51.892,8.965 ccw(c53.517,8.965) C5.1@52.368,7.816 ; R19.1@51.416,9.507 cw(c50.267,8.358) 51.892,8.358 cw(c53.517,8.358) R19.1@52.368,9.507 ; R23.2@51.585,3.88 cw(c51.405,3.468) 51.855,3.468 ; C5.1@51.596,7.636 ccw(c50.881,8.351) 51.892,8.351 ccw(c52.904,8.351) C5.1@52.188,7.636 ; R19.1@51.596,9.687 cw(c50.881,8.971) 51.892,8.971 cw(c52.904,8.971) R19.1@52.188,9.687 ; R23.2@51.83,4.582 cw(c52.109,3.61) 52.825,4.325 ; C5.1@51.855,7.252 C5.1@51.892,7.29 ; R19.1@51.892,10.033 C5.1@51.892,7.29 ; R23.2@51.9,4.338 cw(c52.245,3.136) v1@53.13,4.02 ; R23.2@51.97,4.094 cw(c52.381,2.662) v1@53.434,3.716 ; R23.2@52.124,3.88 ccw(c52.305,3.468) 51.855,3.468 ; C5.1@52.512,7.027 cw(c52.908,6.86) 52.908,7.29 ; C5.1@52.512,7.552 ccw(c52.908,7.72) 52.908,7.29 ; v1@52.967,3.81 ccw(c52.067,3.81) 52.703,4.447 ccw(c53.34,5.083) v1@53.34,4.183 ; v1(53.34,3.81) 52.603,4.547 R23.2@51.855,4.547 51.855,3.468 ; v1@53.856,5.969 ccw(c52.956,5.969) 53.592,6.606 ccw(c54.229,7.242) v1@54.229,6.342 ; v1(54.229,5.969) 52.908,7.29 ; v1(55.118,14.478) 55.118,14.669 R10.2@55.968,15.519 R11.2@55.968,18.263 ; v1@55.118,14.851 ccw(c55.118,15.29) R10.2@55.428,14.98 ; v1@55.237,14.478 cw(c55.986,14.478) R10.2@55.456,15.008 ; v1@55.491,14.478 cw(c56.853,14.478) R10.2@55.89,15.441 ; R10.2@55.492,16.045 ccw(c54.343,17.194) 55.968,17.194 ccw(c57.593,17.194) R10.2@56.444,16.045 ; R11.2@55.492,17.737 cw(c54.343,16.588) 55.968,16.588 cw(c57.593,16.588) R11.2@56.444,17.737 ; R10.2@55.672,15.866 ccw(c54.957,16.581) 55.968,16.581 ccw(c56.98,16.581) R10.2@56.264,15.866 ; R11.2@55.672,17.916 cw(c54.957,17.201) 55.968,17.201 cw(c56.98,17.201) R11.2@56.264,17.916 ; 38.227,4.318 38.227,3.683 38.966,2.944 51.331,2.944 51.855,3.468 ; 38.227,4.318 38.227,6.731 38.786,7.29 C22.1@40.691,7.29 40.499,7.482 C23.2@40.499,10.283 40.691,10.475 C21.1@40.691,12.776 C24.1@40.691,15.519 ; C5.1@51.892,7.29 52.908,7.29
GND_IN: C6.2 F2.1 F4.1 F6.1 P1.1 P1.2 | length 107.2
  Top Layer w0.254: P1.1@3.81,5.842 P1.1@4.318,6.35 4.318,4.826 v1(5.588,3.556) ; P1.1@3.877,5.909 cw(c2.814,4.846) 4.318,4.846 cw(c5.822,4.846) P1.1@4.759,5.909 ; P1.1@4.057,6.089 cw(c3.427,5.459) 4.318,5.459 cw(c5.209,5.459) P1.1@4.579,6.089 ; v1@5.215,3.556 ccw(c4.315,3.556) 4.951,4.193 ccw(c5.588,4.829) v1@5.588,3.929 ; C6.2@14.568,16.5 cw(c12.334,14.266) 15.494,14.266 ; C6.2@14.575,17.034 ccw(c12.537,19.177) v1(15.494,19.177) 15.494,14.224 16.891,12.827 ; C6.2@14.748,16.68 cw(c12.947,14.879) 15.494,14.879 ; C6.2@14.75,16.85 ccw(c13.1,18.585) 15.494,18.585 ; C6.2@14.925,16.666 ccw(c13.664,17.992) 15.494,17.992 ; C6.2@14.928,16.859 cw(c13.56,15.492) 15.494,15.492 ; C6.2@15.1,16.482 ccw(c14.227,17.4) 15.494,17.4 ; C6.2@15.107,17.039 cw(c14.174,16.105) 15.494,16.105 ; v1@15.23,18.913 cw(c14.594,18.277) 15.494,18.277 cw(c16.394,18.277) v1@15.758,18.913 ; C6.2@15.275,16.298 ccw(c14.79,16.808) C6.2@15.494,16.808 ; C6.2@15.287,17.219 cw(c14.787,16.719) C6.2@15.494,16.719 ; v1@17.358,12.598 ccw(c16.891,12.235) 16.891,12.827 ; v1@17.358,13.056 cw(c16.891,13.419) 16.891,12.827 ; v1(17.653,12.827) 16.891,12.827
  Bottom Layer w0.254: v1@5.588,3.81 6.327,3.071 10.033,3.071 10.465,3.503 ; F2.1@10.215,3.872 cw(c10.068,3.503) 10.465,3.503 ; F2.1@10.465,5.016 ccw(c10.465,6.148) 11.265,5.347 ; F2.1@10.465,5.27 ccw(c10.465,7.015) 11.699,5.781 ; F2.1@10.715,3.872 ccw(c10.862,3.503) 10.465,3.503 ; F2.1@10.884,4.597 cw(c11.775,4.597) F2.1@11.145,5.227 ; F2.1@11.138,4.597 cw(c12.642,4.597) 11.578,5.66 ; 12.903,6.985 F2.1@10.465,4.547 10.465,3.503 ; 12.954,6.985 14.152,6.985 14.668,7.5 14.668,9.25 15.02,9.602 15.868,9.602 17.548,11.281 17.548,12.805 17.569,12.827 v1(17.653,12.827) ; v1(15.494,19.177) 16.439,20.122 24.498,20.122 26.078,18.542 27.67,18.542 28.621,19.494 30.671,19.494 31.902,18.263 35.481,18.263 36.776,19.558 41.783,19.558 43.078,18.263 F6.1@43.866,18.263 ; v1@15.494,19.55 ccw(c15.494,20.45) 16.131,19.814 ccw(c16.767,19.177) v1@15.867,19.177 ; v1@17.389,12.563 cw(c17.007,12.181) 17.548,12.181 ; 17.548,11.672 cw(c18.808,11.672) v1@17.917,12.563 ; 17.548,12.285 cw(c18.195,12.285) v1@17.737,12.743 ; 31.116,19.049 ccw(c31.858,19.791) F4.1@32.397,18.89 ; 31.347,18.818 ccw(c32.031,19.502) F4.1@32.527,18.672 ; 31.577,18.588 ccw(c32.203,19.214) F4.1@32.657,18.454 ; 31.807,18.358 ccw(c32.375,18.926) F4.1@32.788,18.236 ; F4.1@33.038,17.966 cw(c33.754,17.251) 33.754,18.263 cw(c33.754,19.274) F4.1@33.038,18.559 ; F4.1@33.218,17.787 cw(c34.367,16.638) 34.367,18.263 cw(c34.367,19.887) F4.1@33.218,18.738 ; 42.202,19.139 ccw(c43.04,19.977) F6.1@43.567,18.916 ; 42.452,18.889 ccw(c43.206,19.643) F6.1@43.68,18.688 ; 42.702,18.639 ccw(c43.372,19.309) F6.1@43.793,18.46 ; 42.952,18.389 ccw(c43.537,18.975) F6.1@43.905,18.233